# Altium PCB HT32.PcbDoc
Units mil, origin at the board's own origin, x right, y up, seen from the top; angles counter-clockwise.
Board outline 3940 x 2560 mil, 4 copper layers (Top Layer, GND02, POWER03, Bottom Layer), stack 23.756 mil thick; 44 components, 65 nets, 272 pads, 108 vias.
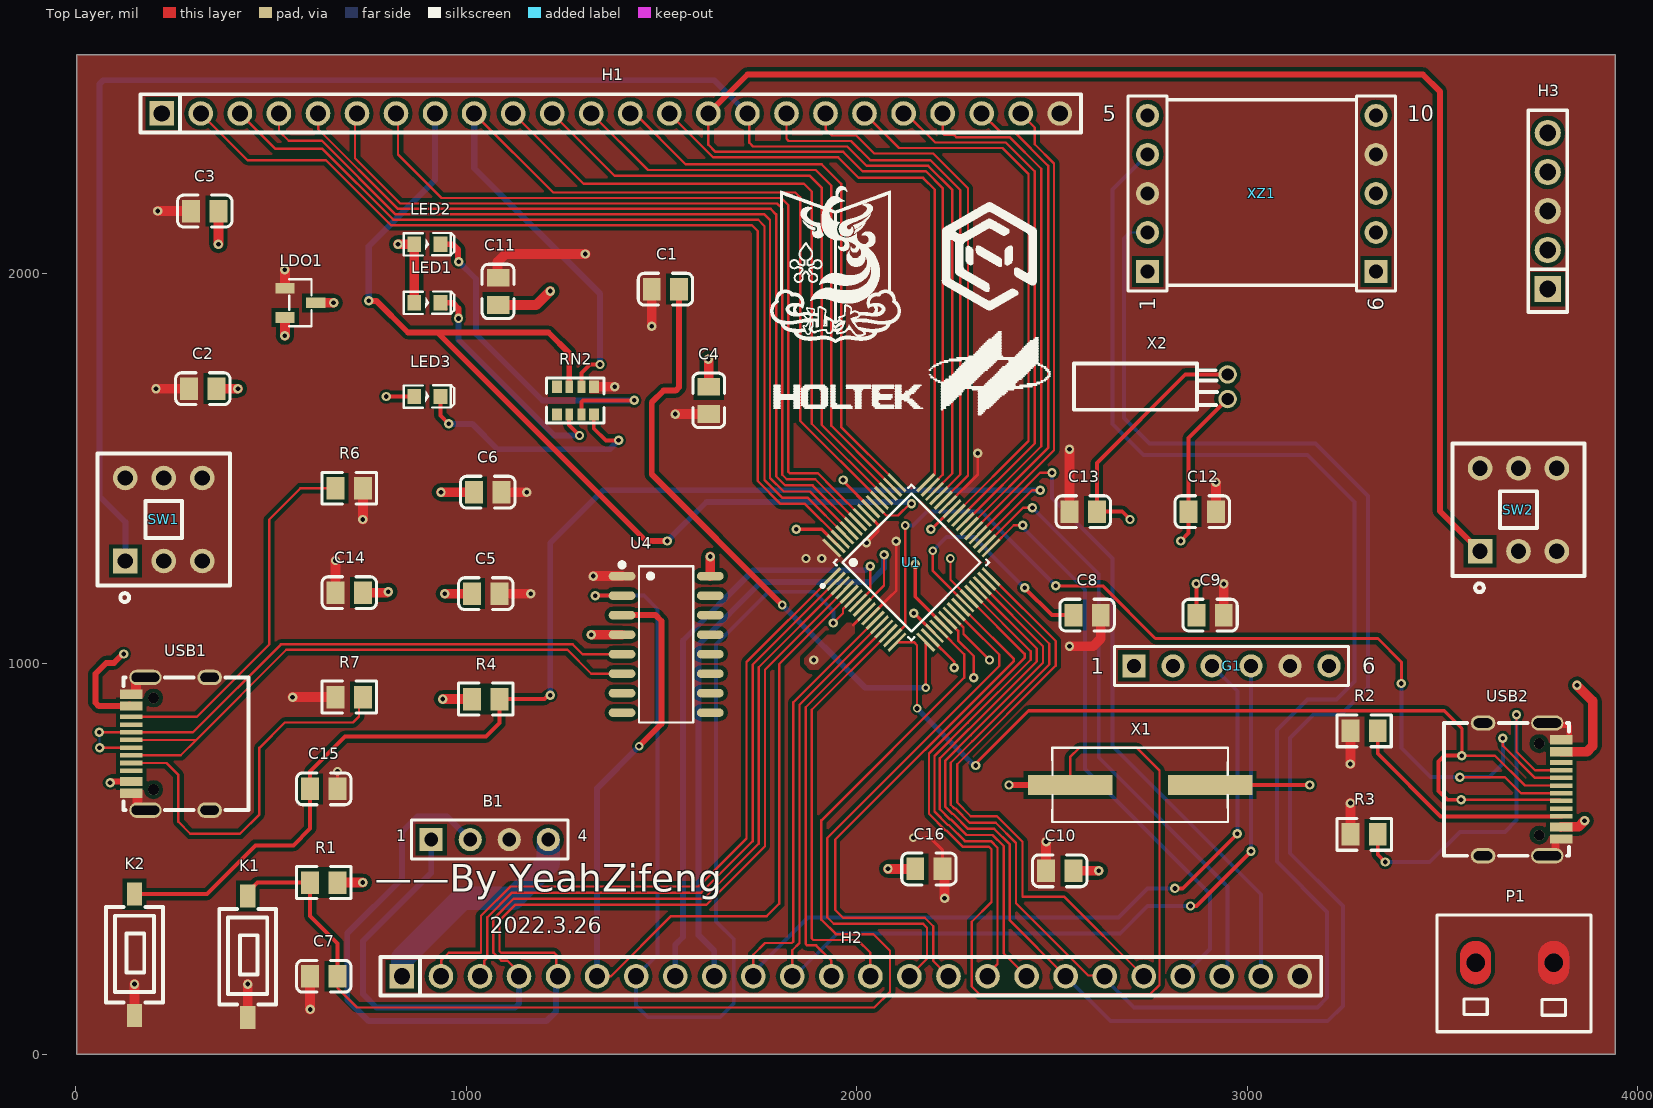
[diagram p0: Top Layer view]
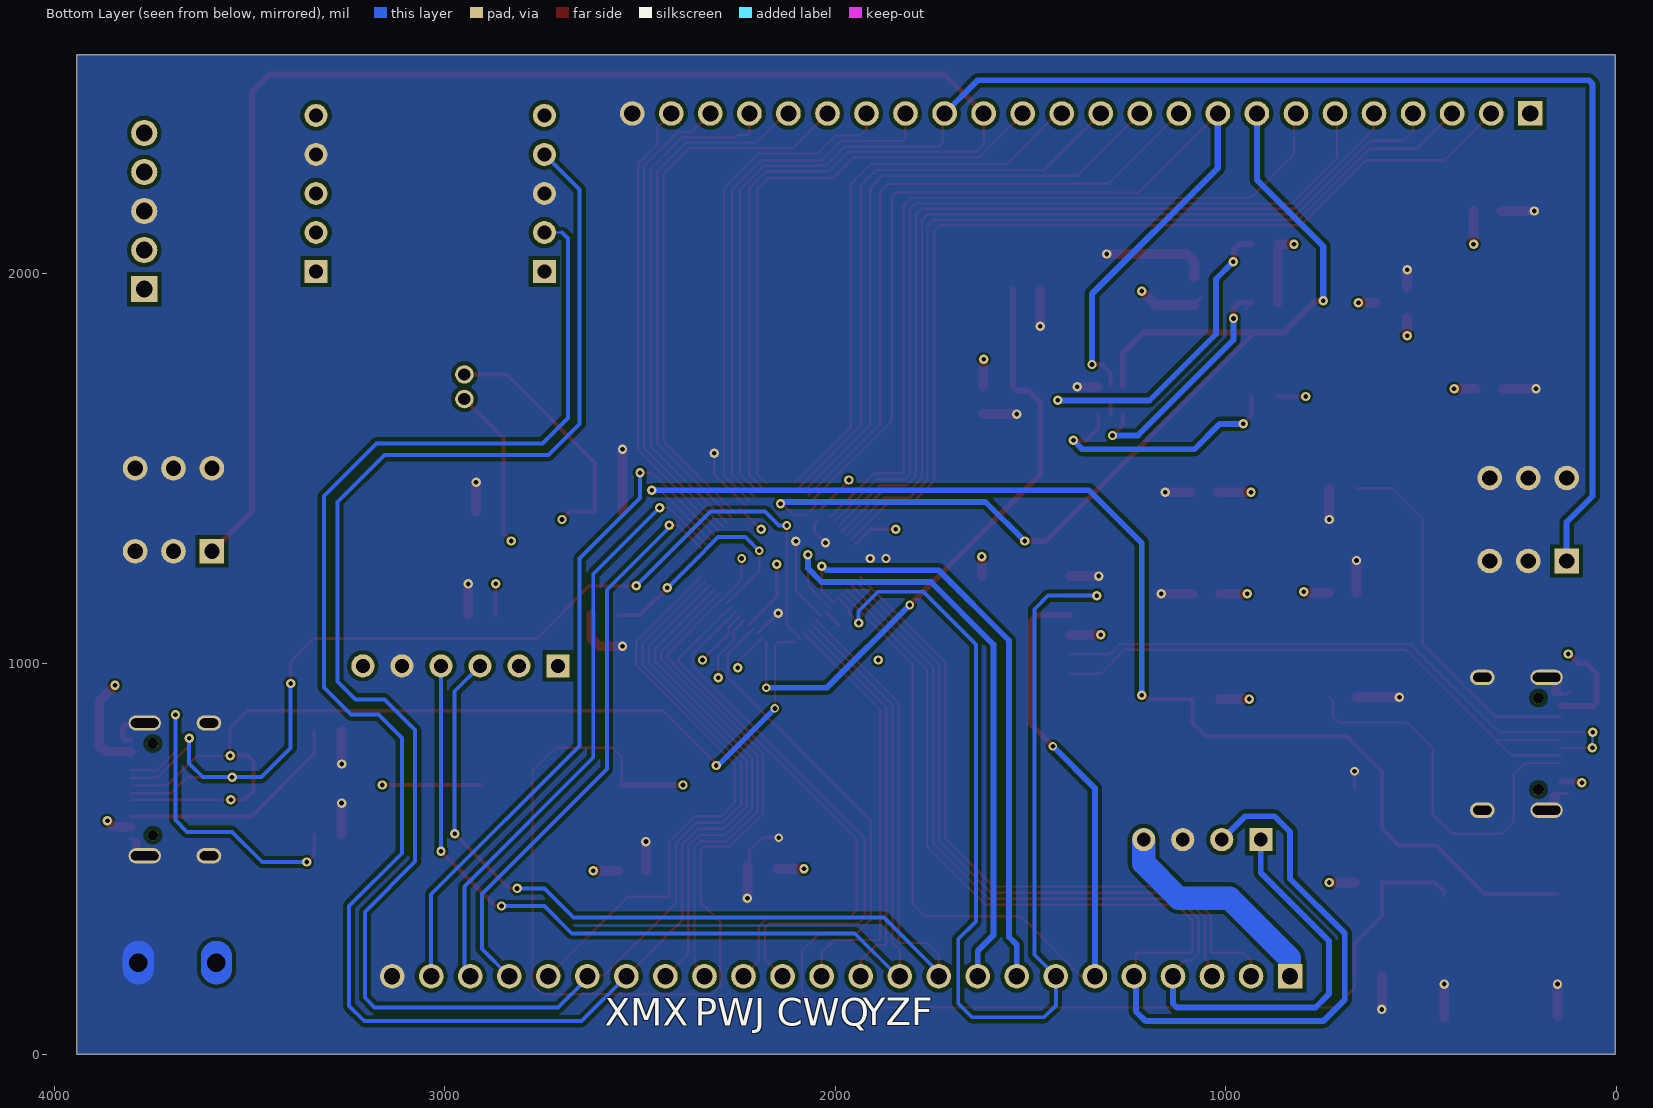
[diagram p1: Bottom Layer view, seen from below]
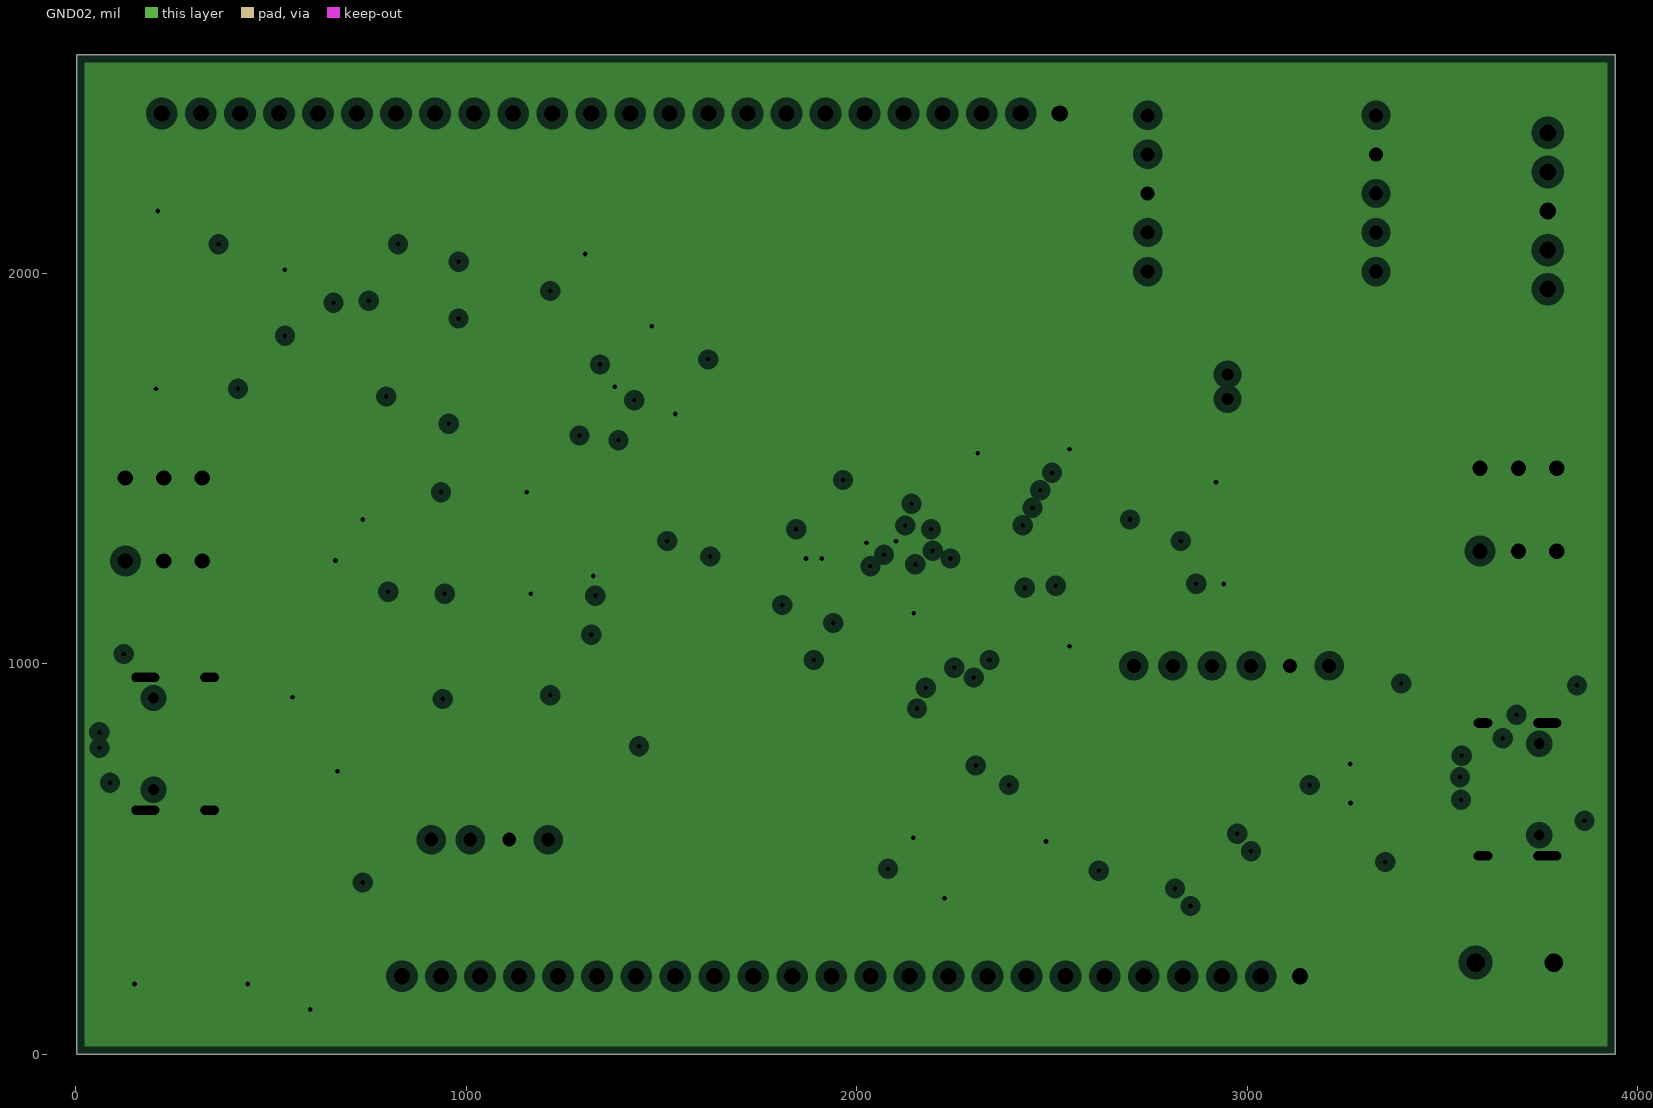
[diagram p2: GND02, clearances drawn from the general rule]
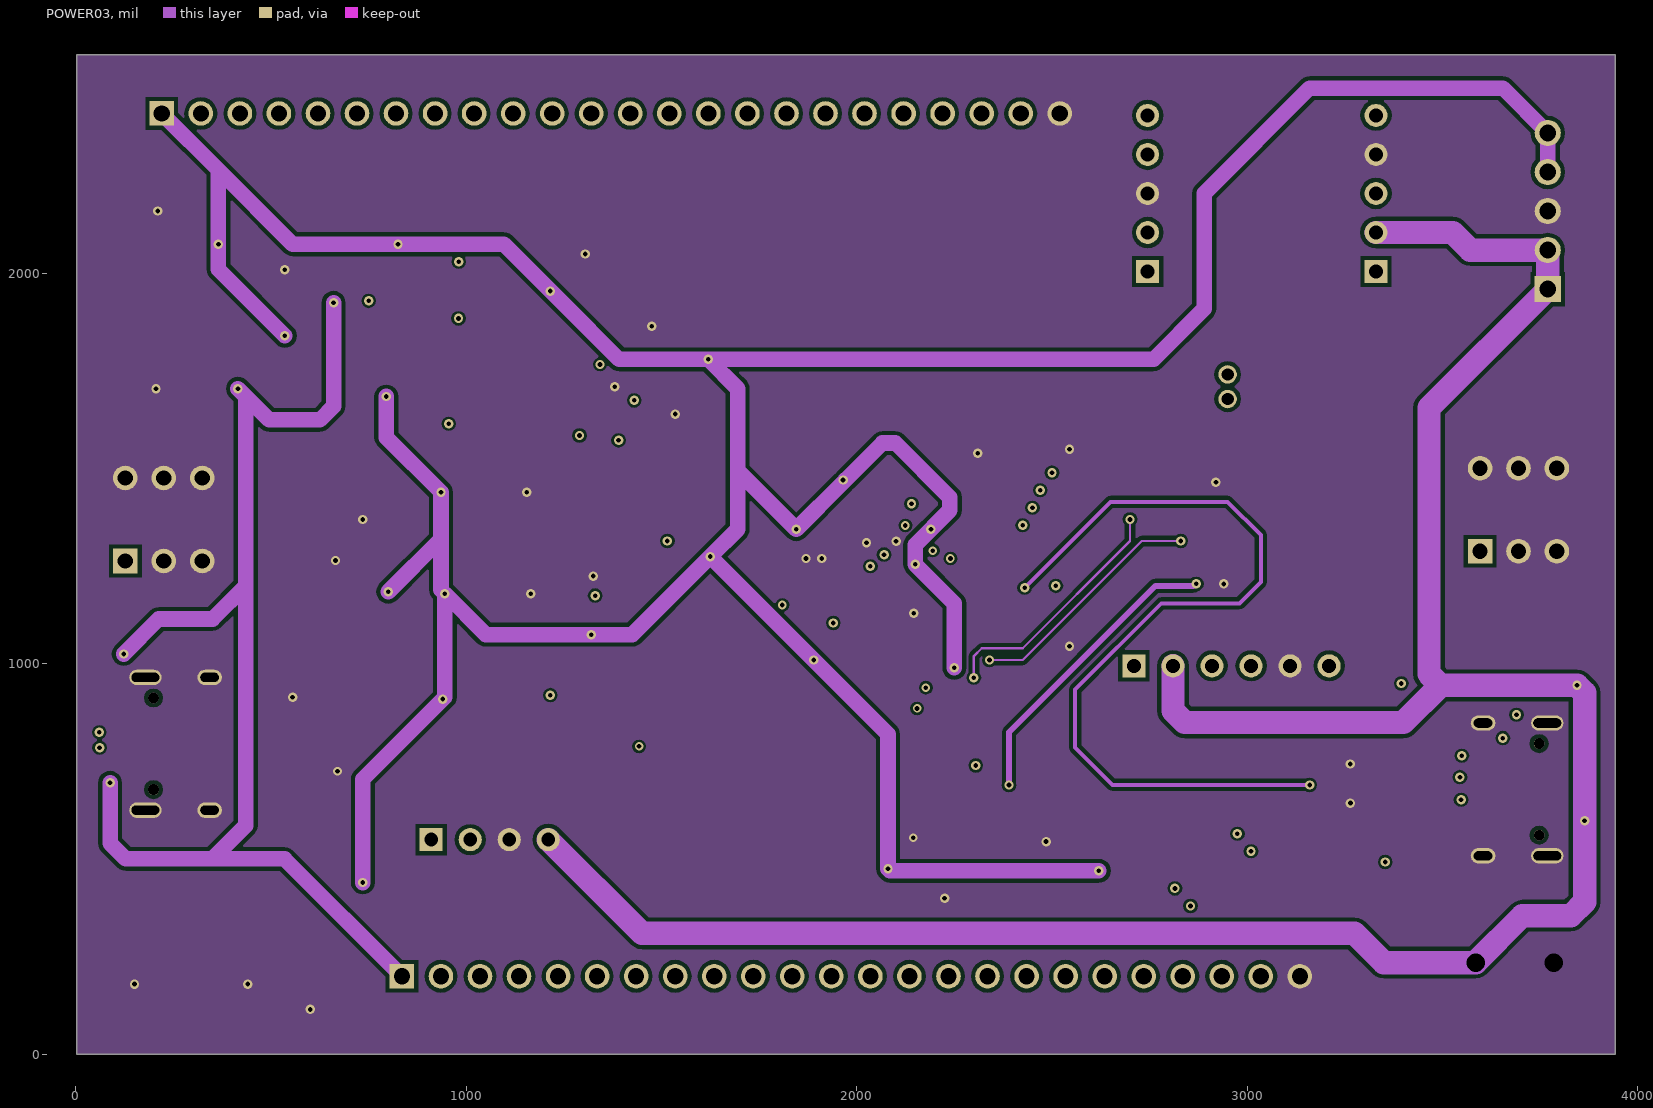
[diagram p3: POWER03]
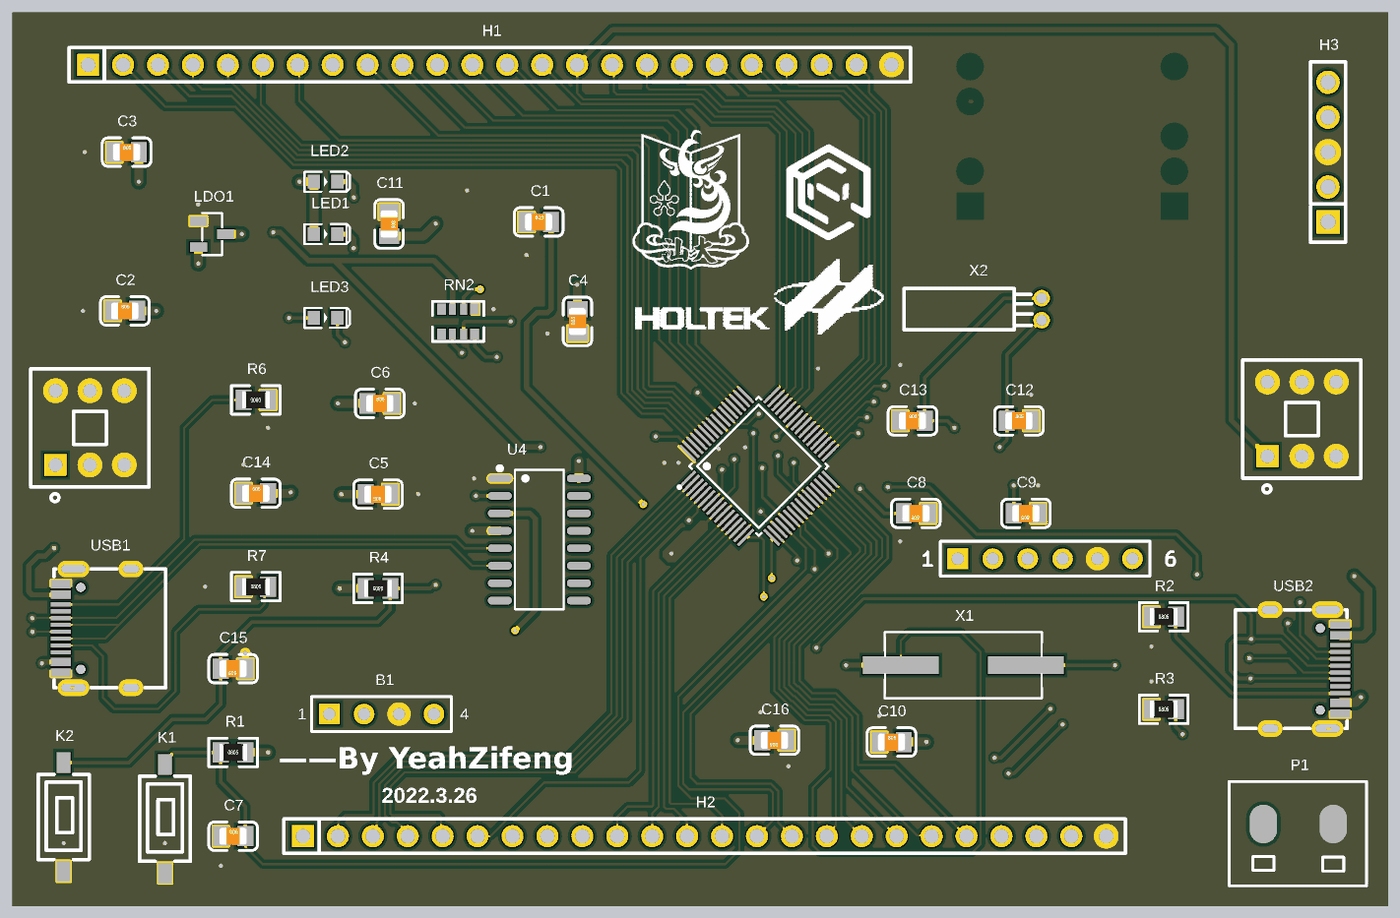
[diagram p4: 3D render of the assembled board from above, using the file's embedded part models]

## Layer stack, top to bottom
Top Solder: solder mask 0.4, Solder Resist, Dk 3.5
Top Layer: signal copper 1.4
Dielectric 2: prepreg 2.8, PP-006, Dk 4.1
GND02: plane copper 1.378, net GND
Dielectric 1: dielectric 12.6, FR-4, Dk 4.8
POWER03: signal copper 1.378
Dielectric 3: prepreg 2.8, PP-006, Dk 4.1
Bottom Layer: signal copper 1.4
Bottom Solder: solder mask 0.4, Solder Resist, Dk 3.5

## Board outline
2.5,0 2.5,2560 3942.5,2560 3942.5,0

## Design rules (kind name [scope] priority, off if disabled: settings)
Clearance [All] p1: gap=6 ignorepadtopadclearanceinfootprint=FALSE except(8: Arc-Arc Arc-Track Track-Track; 10: Arc-Fill Arc-Poly Arc-Region Track-Fill Track-Poly Track-Region SMDPad-Fill SMDPad-Poly SMDPad-Region THPad-Fill THPad-Poly THPad-Region Fill-Fill Fill-Poly Fill-Region Poly-Poly Poly-Region Region-Region)
PlaneClearance [InNetClass('PWR')] p1: clearance=20
PlaneConnect [All] p1: planeconnectstyle=Direct reliefexpansion=20 reliefentries=4 reliefconductorwidth=10 reliefairgap=10
PolygonConnect [All] p1: connectstyle=Direct reliefconductorwidth=10 reliefentries=4 polygonreliefangle="90 Angle" airgapwidth=10
RoutingVias [All] p1: holewidth=12 width=22 viastyle="Through Hole" minholewidth=12 minwidth=22 maxholewidth=12 maxwidth=24
SolderMaskExpansion [All] p1: expansion=4 istentingtop=FALSE
Width PWR [InNetClass('PWR')] p1: maxlimit=80 minlimit=7 preferedwidth=60 toplayer_maxwidth=30 toplayer_prefwidth=7 midlayer1_minwidth=25 bottomlayer_minwidth=25 bottomlayer_prefwidth=40 minimp=50.000000 maximp=50.000000 favimp=50.000000
Width [All] p2: maxlimit=25 minlimit=6 preferedwidth=15 toplayer_prefwidth=7 bottomlayer_prefwidth=10 minimp=50.000000 maximp=50.000000 favimp=50.000000
28 further rules are at their usual default settings.

## Classes and differential pairs
net class PWR: 3.3V +5V GND

## Components (designator, comment, footprint, x,y, rotation, side; value= is the part's Value field where it differs from the comment)
B1 "Bluetooth" HDR1X4 910,550 r0 top
C1 "2.2uF" 0805_C 1510,1960 r0 top
C2 "1u" 0805_C 325,1705 r0 top
C3 "1u" 0805_C 330,2160 r0 top
C4 "0.1u" 0805_C 1621.06,1675 r90 top
C5 "10uF" 0805_C 1050,1180 r180 top
C6 "100nF" 0805_C 1055,1440 r0 top
C7 "0.1uF" 0805_C 634.96,200 r0 top
C8 "22p" 0805_C 2590,1125 r180 top
C9 "22p" 0805_C 2905,1125 r180 top
C10 "0.1u" 0805_C 2520,470 r0 top
C11 "0.1u" 0805_C 1081.36,1954.13 r270 top
C12 "18p" 0805_C 2885,1390 r0 top
C13 "18p" 0805_C 2580,1390 r0 top
C14 "0.1u" 0805_C 700,1182.5 r0 top
C15 "0.1uF" 0805_C 634.96,680 r180 top
C16 "0.1u" 0805_C 2185,475 r180 top
G1 "GY61" HDR1X6 2710,995 r0 top
H1 "X6511WV-24H-C30D60" HDR-TH_24P-P2.54-V-M 1370,2410 r0 top
H2 "X6511WV-24H-C30D60" HDR-TH_24P-P2.54-V-M 1985,200 r0 top
H3 "210-91-05GB01" HDR-TH_5P-P2.54-V-M 3770,2160 r90 top
K1 "SW-PB" SW-SMD_L6.1-W3.7-LS7.9 440,250 r270 top
K2 "SW-PB" SW-SMD_L6.1-W3.7-LS7.9 150,255 r270 top
LDO1 "SC662K-3.3V" SOT-23-3_L2.9-W1.3-P1.90-LS2.4-BR 575,1925 r180 top
LED1 "LED-0603_B" LED0603_BLUE 900,1925 r0 top
LED2 "LED-0603_B" LED0603_BLUE 900,2075 r0 top
LED3 "LED-0603_B" LED0603_BLUE 900,1685 r0 top
P1 "电源" "PCBComponent_1 - duplicate" 3683.43,207.44 r0 top
R1 "4.7K" 0805_R 634.96,440 r0 top
R2 "5.1K" 0805_R 3299.46,828.6 r0 top
R3 "5.1K" 0805_R 3299.5,563.6 r0 top
R4 "4.7K" 0805_R 1050,910 r180 top
R6 "5.1K" 0805_R 700,1450 r180 top
R7 "5.1K" 0805_R 700,915 r0 top
RN2 "4.7K" RES-ARRAY-SMD_0603-8P-L3.2-W1.6-BL 1279.25,1674.57 r0 top
SW1 "PB21E09471" SW-TH_6P-L8.5-W8.5-P2.50-LS5.5-BL 225,1370 r0 top
SW2 "PB21E09471" SW-TH_6P-L8.5-W8.5-P2.50-LS5.5-BL 3695,1395 r0 top
U1 "HT32F52352" LQFP-64_L7.0-W7.0-P0.40-LS9.2-BL 2140,1260 r315 top
U4 "CH340C" SOP-16_L10.0-W3.9-P1.27-LS6.0-BL 1511.91,1050 r270 top
USB1 "TYPEC-304-BCP16" USB-C-SMD_TYPEC-304-BCP16 242.2,795.47 r90 top
USB2 "TYPEC-304-BCP16" USB-C-SMD_TYPEC-304-BCP16 3704.5,678.6 r270 top
X1 "8MHz" HC-49S_L11.4-W4.8 2725.75,690 r0 top
X2 "32.768K" OSC-TH_BD3.1-P0.8-D0.3 2950,1710 r0 top
XZ1 "旋转编码器" "rotary encoder" 7835,10715 r90 top

## Footprints (in the part's own frame and the unit in brackets; to place one, negate y for a bottom-side part, rotate by r counter-clockwise, add the part's x,y. Pads: shape width x height; smd on the part's side, far side on the other; paste and mask are expansions set on the pad)
0805_C [mm]
  rect 1.16x1.47 smd: 1(-0.89,0) 2(0.89,0)
  silkscreen extent -1.77,-1.04 1.77,1.04, body extent -1,-0.62 1,0.63, height 0.77
0805_R [mm]
  rect 1.16x1.47 smd: 1(-0.89,0) 2(0.89,0)
  silkscreen extent -1.77,-1.03 1.77,1.04, body extent -1,-0.62 1,0.63, height 0.49
HC-49S_L11.4-W4.8 [mm]
  rect 5.5x1.3 smd: 1(4.553,0) 2(-4.553,0)
  silkscreen extent -5.71,-2.41 5.71,2.41
HDR1X4 [mm]
  rect 1.5x1.5 hole 0.9: 1(0,0)
  round 1.5 hole 0.9: 2(2.54,0) 3(5.08,0) 4(7.62,0)
  silkscreen extent -1.27,-1.27 8.89,1.27
HDR1X6 [mm]
  rect 1.5x1.5 hole 0.9: 1(0,0)
  round 1.5 hole 0.9: 2(2.54,0) 3(5.08,0) 4(7.62,0) 5(10.16,0) 6(12.7,0)
  silkscreen extent -1.27,-1.27 13.97,1.27
HDR-TH_5P-P2.54-V-M [mm]
  rect 1.7x1.7 hole 1.1: 1(-5.08,0)
  round 1.7 hole 1.1: 2(-2.54,0) 3(0,0) 4(2.54,0) 5(5.08,0)
  silkscreen extent -6.56,-1.27 6.56,1.27
HDR-TH_24P-P2.54-V-M [mm]
  rect 1.6x1.6 hole 1.05: 1(-29.21,0)
  round 1.6 hole 1.05: 2(-26.67,0) 3(-24.13,0) 4(-21.59,0) 5(-19.05,0) 6(-16.51,0) 7(-13.97,0) 8(-11.43,0) 9(-8.89,0) 10(-6.35,0) 11(-3.81,0) 12(-1.27,0) 13(1.27,0) 14(3.81,0) 15(6.35,0) 16(8.89,0) 17(11.43,0) 18(13.97,0) 19(16.51,0) 20(19.05,0) 21(21.59,0) 22(24.13,0) 23(26.67,0) 24(29.21,0)
  silkscreen extent -30.6,-1.25 30.6,1.25
LED0603_BLUE [mm]
  rect 0.9x1 smd: 1(-0.85,0) 2(0.85,0)
  silkscreen extent -1.54,-0.73 1.75,0.73
LQFP-64_L7.0-W7.0-P0.40-LS9.2-BL [mm]
  rect 0.2x1.6 smd: 1(-3,-4.33) 2(-2.6,-4.33) 3(-2.2,-4.33) 4(-1.8,-4.33) 5(-1.4,-4.33) 6(-1,-4.33) 7(-0.6,-4.33) 8(-0.2,-4.33) 9(0.2,-4.33) 10(0.6,-4.33) 11(1,-4.33) 12(1.4,-4.33) 13(1.8,-4.33) 14(2.2,-4.33) 15(2.6,-4.33) 16(3,-4.33) 33(3,4.33) 34(2.6,4.33) 35(2.2,4.33) 36(1.8,4.33) 37(1.4,4.33) 38(1,4.33) 39(0.6,4.33) 40(0.2,4.33) 41(-0.2,4.33) 42(-0.6,4.33) 43(-1,4.33) 44(-1.4,4.33) 45(-1.8,4.33) 46(-2.2,4.33) 47(-2.6,4.33) 48(-3,4.33)
  rect 1.6x0.2 smd: 17(4.33,-3) 18(4.33,-2.6) 19(4.33,-2.2) 20(4.33,-1.8) 21(4.33,-1.4) 22(4.33,-1) 23(4.33,-0.6) 24(4.33,-0.2) 25(4.33,0.2) 26(4.33,0.6) 27(4.33,1) 28(4.33,1.4) 29(4.33,1.8) 30(4.33,2.2) 31(4.33,2.6) 32(4.33,3) 49(-4.33,3) 50(-4.33,2.6) 51(-4.33,2.2) 52(-4.33,1.8) 53(-4.33,1.4) 54(-4.33,1) 55(-4.33,0.6) 56(-4.33,0.2) 57(-4.33,-0.2) 58(-4.33,-0.6) 59(-4.33,-1) 60(-4.33,-1.4) 61(-4.33,-1.8) 62(-4.33,-2.2) 63(-4.33,-2.6) 64(-4.33,-3)
  silkscreen extent -3.58,-5.26 3.58,3.58
OSC-TH_BD3.1-P0.8-D0.3 [mm]
  round 1.2 hole 0.8: 1(0,0.8) 2(0,-0.8)
  silkscreen extent -10,-1.5 -0.7,1.5
"PCBComponent_1 - duplicate" [mm]
  round 0 hole 1.2: 1(-2.5,0.7) 2(2.58,0.7)
  Top Layer region: 251 vertices and 0 holes, not listed, extent -3.5,-0.7 -1.5,2.1
  Top Layer region: 251 vertices and 0 holes, not listed, extent 1.58,-0.7 3.58,2.1
  Bottom Layer region: 251 vertices and 0 holes, not listed, extent -3.5,-0.7 -1.5,2.1
  Bottom Layer region: 251 vertices and 0 holes, not listed, extent 1.58,-0.7 3.58,2.1
  silkscreen extent -5,-3.8 5,3.8
RES-ARRAY-SMD_0603-8P-L3.2-W1.6-BL [mm]
  rect 0.65x0.8 smd: 1(-1.2,-0.9) 4(1.2,-0.9) 5(1.2,0.9) 8(-1.2,0.9)
  rect 0.5x0.8 smd: 2(-0.4,-0.9) 3(0.4,-0.9) 6(0.4,0.9) 7(-0.4,0.9)
  silkscreen extent -1.87,-1.45 1.87,1.47
"rotary encoder" [mm]
  rect 1.5x1.5 hole 0.9: 1(-221.234,129.286) 6(-221.234,114.427)
  round 1.5 hole 0.9: 2(-218.694,129.286) 3(-216.154,129.286) 4(-213.614,129.286) 5(-211.074,129.286) 7(-218.694,114.427) 8(-216.154,114.427) 9(-213.614,114.427) 10(-211.074,114.427)
  silkscreen extent -222.5,113.16 -209.8,130.56
SOP-16_L10.0-W3.9-P1.27-LS6.0-BL [mm]
  oval 0.56x1.745 smd: 1(-4.445,-2.873) 2(-3.175,-2.873) 3(-1.905,-2.873) 4(-0.635,-2.873) 5(0.635,-2.873) 6(1.905,-2.873) 7(3.175,-2.873) 8(4.445,-2.873) 9(4.445,2.873) 10(3.175,2.873) 11(1.905,2.873) 12(0.635,2.873) 13(-0.635,2.873) 14(-1.905,2.873) 15(-3.175,2.873) 16(-4.445,2.873)
  silkscreen extent -5.33,-3.02 5.08,1.77
SOT-23-3_L2.9-W1.3-P1.90-LS2.4-BR [mm]
  rect 1.25x0.7 smd: 1(1,-0.95) 2(1,0.95) 3(-1,0)
  silkscreen extent -0.73,-1.53 0.73,1.53
SW-SMD_L6.1-W3.7-LS7.9 [mm]
  rect 1.5x1 smd: 1(-3.95,0) 2(3.95,0)
  silkscreen extent -3.1,-1.85 3.1,1.85
SW-TH_6P-L8.5-W8.5-P2.50-LS5.5-BL [mm]
  rect 1.6x1.6 hole 1: 1(-2.5,-2.7)
  round 1.6 hole 1: 2(0,-2.7) 3(2.5,-2.7) 4(-2.5,2.7) 5(0,2.7) 6(2.5,2.7)
  silkscreen extent -4.3,-5.36 4.3,4.3
USB-C-SMD_TYPEC-304-BCP16 [mm]
  oval 1x2.1 hole 0.6 slot 1.8 at 90 deg: 13(-4.32,1.633) 14(4.32,1.633)
  oval 1x1.6 hole 0.6 slot 1.2 at 90 deg: 15(-4.32,-2.547) 16(4.32,-2.547)
  rect 0.6x1.45 smd: A1B12(-3.225,2.547) A4B9(-2.45,2.547) B1A12(3.22,2.547) B4A9(2.45,2.547)
  rect 0.3x1.45 smd: A5(-1.25,2.547) A6(-0.25,2.547) A7(0.25,2.547) A8(1.25,2.547) B5(1.75,2.547) B6(0.75,2.547) B7(-0.75,2.547) B8(-1.75,2.547)
  round 0.7 hole 0.7 unplated: ""(-2.98,1.103) ""(2.98,1.103)
  silkscreen extent -4.32,-5.08 4.32,3.05

## Part data
H1 H2: BOM_JLCPCB Part Class="Extended Part", BOM_Manufacturer="XKB Connectivity", BOM_Manufacturer Part=X6511WV-24H-C30D60, BOM_Supplier=LCSC, BOM_Supplier Part=C725956, Contributor=LCSC, spicePre=H, spiceSymbolName=X6511WV-24H-C30D60
H3: BOM_JLCPCB Part Class="Extended Part", BOM_Manufacturer=PINREX, BOM_Manufacturer Part=210-91-05GB01, BOM_Supplier=LCSC, BOM_Supplier Part=C390682, Contributor=LCSC, spicePre=H, spiceSymbolName=210-91-05GB01
LDO1: BOM_JLCPCB Part Class="Extended Part", BOM_Manufacturer=FM, BOM_Manufacturer Part=SC662K-3.3V, BOM_Supplier=LCSC, BOM_Supplier Part=C83932, spicePre=L, spiceSymbolName=SC662K-3.3V
LED1 LED2 LED3: BOM_Manufacturer=EVERLIGHT(台湾亿光), BOM_Manufacturer Part=19-217/BHC-ZL1M2RY/3T, BOM_Supplier=LCSC, BOM_Supplier Part=C72041, Contributor=LCEDA_01, spicePre=L, spiceSymbolName=LED-0603_B
RN2: BOM_JLCPCB Part Class="Extended Part", BOM_Manufacturer=PANASONIC, BOM_Manufacturer Part=EXB-38V472JV, BOM_Supplier=LCSC, BOM_Supplier Part=C194232, Contributor=LCSC, nameAlias="Resistance (Ohms)", spicePre=R, spiceSymbolName=EXB-38V472JV
SW1 SW2: BOM_JLCPCB Part Class="Extended Part", BOM_Manufacturer=GANGYUAN, BOM_Manufacturer Part=PB21E09471, BOM_Supplier=LCSC, BOM_Supplier Part=C194403, Contributor=LCSC, spicePre=S, spiceSymbolName=PB21E09471
U1: BOM_JLCPCB Part Class="Extended Part", BOM_Manufacturer=HOLTEK, BOM_Manufacturer Part=HT32F52352, BOM_Supplier=LCSC, BOM_Supplier Part=C97188, spicePre=U, spiceSymbolName=HT32F52352
U4: BOM_JLCPCB Part Class="Extended Part", BOM_Manufacturer=WCH, BOM_Manufacturer Part=CH340C, BOM_Supplier=LCSC, BOM_Supplier Part=C84681, spicePre=U, spiceSymbolName=CH340C
USB1 USB2: BOM_JLCPCB Part Class="Extended Part", BOM_Manufacturer=XUNPU, BOM_Manufacturer Part=TYPEC-304-BCP16, BOM_Supplier=LCSC, BOM_Supplier Part=C720629, Contributor=LCSC, spicePre=U, spiceSymbolName=TYPEC-304-BCP16
X1: BOM_JLCPCB Part Class="Extended Part", BOM_Manufacturer="Zhejiang Abel Elec", BOM_Manufacturer Part=HC-49SM8MHz20pF30ppm, BOM_Supplier=LCSC, BOM_Supplier Part=C107426, Contributor=LCSC, nameAlias=Frequency, spicePre=X, spiceSymbolName=HC-49SM8MHZ20PF30PPM
X2: BOM_JLCPCB Part Class="Extended Part", BOM_Manufacturer="KDS Daishinku", BOM_Manufacturer Part=1TC125DFNS019, BOM_Supplier=LCSC, BOM_Supplier Part=C213421, Contributor=LCSC, nameAlias=Value, spicePre=X, spiceSymbolName=1TC125DFNS019
C1 C4 C10 C11 C14 C16: Contributor=LCEDA_Lib, nameAlias=Value(F), spicePre=C, spiceSymbolName=C_0603_EU
C2 C3 C8 C9 C12 C13: Contributor=LCEDA_Lib, nameAlias=Value(F), spicePre=C, spiceSymbolName=C_0603_US
C5 C6 C7 C15: nameAlias=Value(F), spicePre=C, spiceSymbolName=Cap_RAD-0.1_US
K1 K2: Contributor=ZhangYonghui, spicePre=K, spiceSymbolName=SW-PB
R1 R4: Contributor=LCEDA_Lib, nameAlias=Value(Ω), spicePre=R, spiceSymbolName=R_0603_US
R2 R3 R6 R7: BOM_Supplier=LCSC, nameAlias=Value(Ω), spicePre=R, spiceSymbolName=Resistor

## Via types
v1: diameter 24, hole 12, Top Layer to Bottom Layer, tented both sides, 98 vias
v2: diameter 22, hole 12, Top Layer to Bottom Layer, 6 vias
v3: diameter 22, hole 12, Top Layer to Bottom Layer, tented both sides, 4 vias

## Nets (pads, with @x,y where several pads share a name; then routed paths per layer and width w, separated by ;. In a path a pad name is that pad's centre, name@x,y a point inside that pad or via, vN(x,y) a via of type N, cw(c..) or ccw(c..) an arc to the next point about the centre after c; other vN are vias at no path point)
3.3V: C3.2 C4.2 C5.2 C6.1 C10.2 C11.2 C14.2 C16.2 H1.1 H3.4 H3.5 LDO1.2 LED1.1 LED2.1 LED3.1 R1.2 R4.2 U1.9 U1.18 U1.21 U1.42 U1.55 U1.63 U4.4 U4.16 | length 12568.4
  Top Layer w7: 1991.14,1100 U1.9 ; U1.55 U1.55@2036.16,1397.86 ; U1.18 2250,1005.24 v1(2250,990)
  Top Layer w8: v1(1845,1345) 1910.24,1345 U1.63 ; v1(1965,1471) 1965,1469.03 U1.55@2036.16,1397.86 ; v1@2150,1260 v1(2150,1255) 2150,1172.05 U1.21 ; v1(2190,1345) 2191.59,1345 U1.42
  Top Layer w10: v1(795,1685) LED3.1 ; C11.2@1063.53,1936.93 C11.2
  Top Layer w25: v1(365.04,2075.04) C3.2 ; v1(535.32,1840.32) 535.63,1840.63 LDO1.2 ; R1.2 v1(735,440) ; C14.2 797.5,1182.5 v1(800,1185) ; v1(825,2075) LED2.1 LED1.1 ; v1(935,1440) C6.1 ; v1(940,910) R4.2 ; v1(945,1180) C5.2 ; C11.2 1179.09,1919.09 v1(1215,1955) ; v1(1320,1075) U4.4 ; v1(1620,1780) 1621.06,1778.94 C4.2 ; U4.16 v1(1625,1275) ; v1(2080,475) C16.2 ; C10.2 v1(2620,470)
  POWER03 w25: 935,1190 v1(945,1180) ; v1(940,910) v1@945,915 ; v1@1965,1465 v1(1965,1471) ; v1(2080,475) v1@2085,470
  POWER03 w40: H1.1 365.04,2264.96 ; v1(535.32,1840.32) 365.04,2010.59 v1(365.04,2075.04) 365.04,2264.96 ; v1(735,440) 735,705 v1(940,910) ; v1(795,1685) 795,1580 v1(935,1440) 935,1320 ; v1(800,1185) 935,1320 ; v1(825,2075) 555,2075 365.04,2264.96 ; v1(825,2075) 1096.32,2075.04 1245.68,1925.68 1391.36,1780 v1(1620,1780) ; 935,1190 935,1320 ; v1@945,915 v1(945,1180) 1050,1075 v1(1320,1075) 1425,1075 v1(1625,1275) ; v1@1965,1465 v1(1845,1345) 1695,1495 ; v1@1971,1471 2065.93,1565.93 2099.07,1565.93 2238.43,1426.57 2238.43,1393.43 2150,1305 v1(2150,1255) 2250,1155 v1(2250,990) ; v1(2080,475) 2080,820 v1(1890,1010) v1(1625,1275) ; v1@2085,470 v1(2620,470) ; H3.4 H3.5 3655,2475 3160,2475 2890,2205 2890,1910 2760,1780 v1(1620,1780) ; v1(1620,1780) 1695,1705 1695,1495 ; v1(1625,1275) 1695,1345 1695,1495
+5V: B1.4 C2.2 G1.2 H2.1 H3.1 H3.2 LDO1.3 P1.1 USB1.A4B9 USB1.B4A9 USB2.A4B9 USB2.B4A9 XZ1.7 | length 10862.8
  Top Layer w15: v1(87.5,695.55) 90.96,699.01 USB1.A4B9 ; v1(122.5,1025.55) 120.06,1025.55 97.13,1002.62 77.62,1002.62 50,975 50,900.71 58.79,891.93 USB1.B4A9 USB1.B4A9@137.6,896.24
  Top Layer w25: C2.2 v1(415,1705) ; LDO1.3 v1(660,1925) ; USB2.B4A9 3805.48,582.84 3848.73,582.84 v1(3864.28,598.39) ; USB2.A4B9 3870.36,775.06 3885,789.71 3885,905 v1(3845,945)
  POWER03 w40: v1(87.5,695.55) 87.5,540.55 127.5,500.55 349.45,500.55 ; v1(122.5,1025.55) 211.95,1115 350,1115 435,1200 ; v1(415,1705) 435,1685 ; v1(660,1925) 660,1660 625,1625 495,1625 435,1685 ; H2.1 534.45,500.55 349.45,500.55 ; 349.45,500.55 435,586.1 435,1200 ; 435,1200 435,1685
  POWER03 w60: B1.4 1450,310 3275,310 3349.99,235.01 P1.1 3705,355 3829.13,355 3864.28,390.15 v1(3864.28,598.39) 3864.28,925.72 v1(3845,945) 3495,945 ; G1.2 2810,880 2840,850 3400,850 3495,945 ; XZ1.7 3526.56,2105 3571.56,2060 H3.2 H3.1 3465.84,1655.84 3465.84,974.16 3495,945
  Bottom Layer w60: H2.1 836.5,201.5 836.5,246.5 990,400 1120,400 1210,490 B1.4
CDP+: U1.16 USB2.A6 USB2.B6 | length 2575.6
  Top Layer w6: U1.16 2146.5,1055.94 2154.5,1047.94 v2(2154.5,886) ; v1(3547.96,652.04) 3801.83,652.04 USB2.B6 ; v1(3550,765) 3635,765 3711.55,688.45 USB2.A6
  Top Layer w8: v1(2305,740) 2305,745 2440,880 3505,880 3550,835 v1(3550,765)
  Top Layer w10: v1(3547.96,652.04) 3512.96,652.04 3490,675 3490,750 3505,765 v1(3550,765)
  Bottom Layer w8: v1@2300.5,740 v1(2305,740)
  Bottom Layer w15: v2(2154.5,886) v1@2300.5,740
CDP-: U1.15 USB2.A7 USB2.B7 | length 2816.7
  Top Layer w6: U1.15 2124.63,1099.87 v3(2124.63,1354.63) ; v1(3545,710) 3660,710 3701.24,668.76 USB2.A7 ; v1(3655,810) 3655,790.2 3737.07,708.13 USB2.B7
  Top Layer w8: v1(2510,1200) 2630,1200 2765,1065 3335,1065 3395,1005 v1(3395,950)
  Bottom Layer w10: v3(2124.63,1354.63) 2144.63,1354.63 2180,1390 2320,1390 v1(2510,1200) ; v1(3395,950) 3395,785 3470,710 v1(3545,710) 3620,710 3655,745 v1(3655,810)
CLDO: C1.2 U1.17 | length 1567.1
  Top Layer w6: v2(2177.03,939) U1.17
  Top Layer w15: C1.2 C1.2 1545,1708.79 1536.21,1700 1505,1700 1475,1670 1475,1485.5 v2(1809.5,1151)
  Bottom Layer w15: v2(1809.5,1151) 2021.5,939 v2(2177.03,939)
DP+: U4.5 USB1.A6 USB1.B6 | length 1563.4
  Top Layer w6: v1(60,825) USB1.B6 300,825 525.08,1050.08 1272.76,1050.08 1297.84,1025 U4.5 ; v1(60.63,785.63) USB1.A6
  Bottom Layer w6: v1(60,825) 60.31,824.69 60.31,785.94 v1(60.63,785.63)
DP-: U4.6 USB1.A7 USB1.B7 | length 1560.3
  Top Layer w6: USB1.B7 268.78,765.94 308.15,805.31 ; USB1.A7 308.15,805.31 ; U4.6 1320,975 1258.92,1036.08 538.92,1036.08 308.15,805.31
GND: B1.3 C1.1 C2.1 C3.1 C4.1 C5.1 C6.2 C7.1 C8.1 C9.1 C10.1 C11.1 C12.2 C13.1 C14.1 C15.1 C16.1 G1.5 H1.24 H2.24 H3.3 K1.2 K2.2 LDO1.1 P1.2 R2.1 R3.1 R6.1 R7.1 RN2.5 SW1.2 SW1.3 SW1.4 SW1.5 SW1.6 SW2.2 SW2.3 SW2.4 SW2.5 SW2.6 U1.10 U1.19 U1.43 U1.56 U1.64 U4.1 USB1.13 USB1.14 USB1.15 USB1.16 USB1.A1B12 USB1.B1A12 USB2.13 USB2.14 USB2.15 USB2.16 USB2.A1B12 USB2.B1A12 XZ1.3 XZ1.9 | length 3589.4
  Top Layer w7: 2089.2,1175.8 2101.5,1188.09 2101.5,1313.5 v1(2100.75,1314.25) ; U1.43 2310,1485.68 v1(2310,1540)
  Top Layer w8: USB1.B1A12@117.37,930.05 125.18,922.24 USB1.B1A12 145.93,922.24 USB1.B1A12@153.75,930.05 ; USB1.A1B12@125.18,668.5 USB1.A1B12 149.69,668.5 USB1.A1B12@157.5,660.69 ; K2.2@150,96.5 K2.2 ; USB1.14@153.75,951.06 168.24,965.55 USB1.14 ; USB1.13@157.5,639.89 171.99,625.39 USB1.13 ; K1.2 K1.2@440,96.5 ; v1@533.75,2011.25 v1@535.63,2009.37 ; C14.1 C14.1@664.96,1194 ; C15.1 v2(670,724.94) ; v1@735.04,1378 R6.1 ; U4.1@1382.5,1225 U4.1 ; 1590.46,1639.96 C4.1 ; v1(2025,1310) 2054.08,1339.08 2054.08,1357.05 U1.56@2044.47,1366.67 ; U1.10 2089.2,1175.8 ; v3(2145,555) 2187.5,555 2220.04,522.46 C16.1 ; v1(2145.63,1130) 2147.51,1130 2157.83,1119.68 U1.19 ; C10.1 2484.96,502.46 ; C12.2 2920.04,1426 ; C9.1 2940.04,1177.46 ; v1@3259.5,738.6 v1@3262.56,735.54 ; v1(3264.5,643.6) v1(3264.5,643.6) ; USB2.14 3775.51,508.53 USB2.14@3790,523.02 ; USB2.B1A12@3790,544.02 3797.81,551.83 USB2.B1A12
  Top Layer w15: v1(2545,1550) v1(2545,1550) ; USB2.13 3773.44,844.02 3820.88,844.02 3825,839.9 3825,809.89 3820.69,805.58 USB2.A1B12
  Top Layer w20: USB2.14@3790,523.02 USB2.B1A12@3790,544.02
  Top Layer w25: K2.2 v1(150,180) ; USB1.B1A12@153.75,930.05 USB1.14@153.75,951.06 ; USB1.13@157.5,639.89 USB1.A1B12@157.5,660.69 ; v1(205,1705) C2.1 ; v1(210,2160) C3.1 ; K1.2 v1(440,180) ; v1(535,2010) 535.63,2009.37 LDO1.1 ; v1(555,915) R7.1 ; C7.1 v1(599.92,115.08) v1@600,115 ; C14.1 v1(665,1265) v1(665,1265) ; v1(735,1370) v1(735,1370) R6.1 ; C11.1 1080,1990.53 1080,2030 1100,2050 v1(1305,2050) ; C5.1 v1(1165,1180) ; C6.2 v1(1155,1440) ; v1(1325,1225) U4.1 ; RN2.5 v1(1380,1710) ; C1.1 v1(1474.96,1865.04) v1(1474.96,1865.04) ; v1(1534.96,1639.96) C4.1 ; C16.1 C16.1@2225,470.04 ; v1(2225,400) C16.1@2225,470.04 ; C16.1@2225,480 C16.1@2225,470.04 ; C10.1 v1(2484.96,544.96) v1(2484.96,544.96) ; C13.1 v1(2545,1550) ; v1(2545,1045) 2605,1045 2625.04,1065.04 C8.1 ; v1(2920.04,1464.96) v1(2920.04,1464.96) C12.2 ; v1(2940.04,1204.96) v1(2940.04,1204.96) C9.1 ; v1(3264.42,743.53) R2.1 ; R3.1 v1(3264.5,643.6) v1(3264.5,643.6)
  other v1: 1870,1270 1910,1270
NetLED1_2: LED1.2 RN2.2 | length 642
  Top Layer w6: LED1.2 933.46,1923.03 LED1.2@948.18,1908.32 ; v1@976.56,1888.44 v1(980,1885)
  Top Layer w10: RN2.2 1263.5,1611.5 v1(1290,1585)
  Top Layer w15: LED1.2 965,1925 980,1910 v1(980,1885)
  Bottom Layer w6: 979.99,1825.01 979.99,1829.99
  Bottom Layer w15: v1(980,1885) 980,1830 1225,1585 v1(1290,1585)
NetLED2_2: LED2.2 RN2.3 | length 932.6
  Top Layer w6: LED2.2@933.46,2073.03 LED2.2
  Top Layer w10: RN2.3 1295,1671.49 1298.51,1675 v1(1430,1675)
  Top Layer w15: LED2.2 965,2075 979.02,2060.98 979.02,2031.72 v1(980.75,2030)
  Bottom Layer w15: v1(980.75,2030) 1025,1985.75 1025,1845 1195,1675 v1(1430,1675)
NetLED3_2: LED3.2 RN2.4 | length 662.1
  Top Layer w10: LED3.2 933.46,1636.54 v1(955,1615) ; RN2.4 1326.49,1603.51 1357.33,1572.67 v1(1390,1572.67)
  Bottom Layer w15: v1(955,1615) 1015,1615 1080,1550 1367.33,1550 v1(1390,1572.67)
NetR2_2: R2.2 USB2.B5 | length 595
  Top Layer w10: R2.2 3334.5,770.5 3495.29,609.71 USB2.B5
NetR3_2: R3.2 USB2.A5 | length 959.1
  Top Layer w6: v1(3690,870) 3690,775 3737.18,727.82 USB2.A5
  Top Layer w10: R3.2 3334.54,511.6 v1(3353.54,492.6)
  Bottom Layer w10: v1(3353.54,492.6) 3467.6,492.6 3545,570 3660,570 3690,600 v1(3690,870)
NetR6_2: R6.2 USB1.B5 | length 953.1
  Top Layer w6: USB1.B5 309.37,864.37 495,1050 495,1370 575,1450 R6.2
NetR7_2: R7.2 USB1.A5 | length 1006.7
  Top Layer w6: USB1.A5 231.79,746.26 262.5,715.55 262.5,595.55 293.05,565 420.42,565 470,614.58 470,785 535,850 710,850 725,865 725,904.96 R7.2
NRST: C7.2 K1.1 R1.1 U1.20 | length 3167.7
  Top Layer w6: K1.1 K1.1@440,415.35 ; C7.2 670,170 720,120 2045,120 2085,160 2085,265.5 2042.5,308 1946.5,308 1909.5,345 1909.5,599.3 2275,964.8 2275,1024.78 U1.20
  Top Layer w10: K1.1@440,415.35 464.65,440 R1.1 599.92,354.08 670,284 C7.2
PA0: H2.2 U1.1 | length 1768.5
  Top Layer w6: H2.2 935.5,200.5 935.5,240.5 955,260 1037.76,260 1037.76,354.91 1112.85,430 1595,430 1717.76,552.76 1717.76,1004.79 U1.1
PA1: H2.3 U1.2 | length 1673.5
  Top Layer w6: H2.3 1045.9,210.9 1045.9,239.36 1053.5,246.96 1053.5,350.86 1116.9,414.25 1601.52,414.25 1733.5,546.23 1733.5,998.27 U1.2
PA2: B1.1 H2.4 U1.3 | length 2646.8
  Top Layer w6: H2.4 1135,210 1105,240 1089.25,240 1069.25,260 1069.25,346.81 1120.95,398.5 1608.05,398.5 1749.25,539.71 1749.25,991.74 U1.3
  Bottom Layer w15: B1.1 910,465 735,290 735,155 770,120 1125,120 1135,130 H2.4
PA3: B1.2 H2.5 U1.4 | length 3149
  Top Layer w6: H2.5 1230,205 1230,255 1225,260 1089.05,260 1085,264.05 1085,342.76 1125,382.76 1614.57,382.76 1765,533.19 1765,985.22 U1.4
  Bottom Layer w6: H2.5@1230,195 H2.5
  Bottom Layer w15: B1.2 950,610 875,610 835,570 835,450 695,310 695,140 750,85 1205,85 1230,110 H2.5@1230,195
PA4: H2.6 U1.5 U4.3 | length 2495.9
  Top Layer w6: H2.6 1370.5,200 1524.5,354 1769.5,354 1801.5,386 1801.5,999.45 1947.05,1145 U1.5
  Top Layer w15: U4.3 1485,1125 1500,1110 1500,846.5 v2(1442.5,789)
  Bottom Layer w15: H2.6 1335,681.5 v2(1442.5,789)
PA5: H2.7 U1.6 U4.2 | length 2987
  Top Layer w6: v1(1940,1105) 1965,1130 1965,1140.68 U1.6
  Top Layer w10: v1(1330,1175) U4.2
  Bottom Layer w10: v1(1330,1175) 1455,1175 1490,1140 1490,255 H2.7 1435,125 1465,95 1650,95 1685,130 1685,295 1640,340 1640,1050 1775,1185 1890,1185 1940,1135 v1(1940,1105)
PA6: H2.8 U1.7 | length 1535.7
  Top Layer w6: U1.7@2002.76,1157.65 U1.7 2035,1188.41 v1(2035,1250)
  Bottom Layer w15: H2.8 1535,280.69 1555,300.69 1555,1060 1735,1240 2022.56,1240 2032.56,1250 v1(2035,1250)
PA7: H2.9 U1.8 | length 1615.6
  Top Layer w6: U1.8 2070,1201.14 v1(2070,1280)
  Bottom Layer w15: H2.9 1635,265 1595,305 1595,1050 1755,1210 2035,1210 2070,1245 v1(2070,1280)
PA8: H2.22 U1.34 | length 1568.4
  Top Layer w6: U1.34 2334.25,1308.16 2426.09,1400 v1(2450,1400)
  Bottom Layer w10: v1(2450,1400) 2620,1230 2620,760 2950,430 2950,229.34 2935,214.34 H2.22
PA9_BOOT: C15.2 K2.1 R4.1 U1.35 | length 3299.3
  Top Layer w6: v1@1210.13,920 v1(1215,920) ; U1.35 2323.11,1319.3 2448.81,1445 v1(2470,1445)
  Top Layer w10: K2.1 336.02,410.51 460.51,535 556.92,535 599.92,578 C15.2 599.92,724.92 689,814 1050.5,814 1085.04,848.54 R4.1 1200.13,910 v1@1210.13,920
  Bottom Layer w15: v1(1215,920) 1215,1310 1350,1445 v1(2470,1445)
PA10: H2.23 U1.36 | length 1767
  Top Layer w6: U1.36 2470.22,1490 v1(2500,1490)
  Bottom Layer w10: v1(2500,1490) 2500,1425 2655,1270 2655,790 3035,410 H2.23
PA11: H1.23 U1.37 | length 1188.8
  Top Layer w6: U1.37 2505.07,1547.12 2505.07,2281.95 2456.01,2331.01 2456.01,2373.99 H1.23
PA12_SWCLK: H1.22 U1.38 | length 1233.3
  Top Layer w6: U1.38 2289.71,1352.7 2490.26,1553.25 2490.26,2275.82 2402.66,2363.41 2366.59,2363.41 H1.22
PA13_SWDIO: H1.21 U1.39 | length 1326.6
  Top Layer w6: H1.21 2220,2360 2225,2355 2249.41,2355 2255,2349.41 2391.46,2349.41 2472.43,2268.43 2472.43,1557.7 2278.57,1363.84 U1.39
PA14: H1.20 U1.40 | length 1362.3
  Top Layer w6: H1.20 2126.54,2410 2201.14,2335.41 2381.86,2335.41 2455.75,2261.52 2455.75,1564.61 U1.40
PA15: H1.19 U1.41 | length 1429.7
  Top Layer w6: H1.19 2108.59,2321.41 2373.59,2321.41 2440,2255 2440,1571.14 U1.41
PB0: H1.18 U1.44 | length 1292.9
  Top Layer w6: H1.18 1920.5,2409.5 1920.5,2369.5 1936.5,2353.5 1998.91,2353.5 2045,2307.41 2195.85,2307.41 2285,2218.26 2285,1482.95 U1.44
PB1: H1.17 U1.45 | length 1370
  Top Layer w6: H1.17 1820,2345 1825.5,2339.5 1985.5,2339.5 2035,2290 2188.64,2290 2265,2213.64 2265,1485.22 U1.45
PB2: H1.13 U1.49 | length 1439.7
  Top Layer w6: H1.13 1431.76,2410 1561.76,2280 1910,2280 1960,2230 1960,1607.03 U1.49
PB3: H1.12 U1.50 | length 1528.7
  Top Layer w6: H1.12 1465,2265 1895,2265 1935,2225 1935,1610 2062.02,1482.98 2091.84,1453.16 U1.50
PB4: H1.11 U1.51 | length 1617.6
  Top Layer w6: H1.11 1380,2250 1880,2250 1910,2220 1910,1612.49 2048.02,1474.47 U1.51
PB5: H1.10 U1.52 | length 1703.6
  Top Layer w6: H1.10 1300,2230 1865,2230 1885,2210 1885,1615.22 U1.52
PB6: H1.4 U1.60 | length 2316.4
  Top Layer w6: H1.4 520,2365 545,2340 630.4,2340 818.92,2151.48 1763.52,2151.48 1777.76,2137.25 1777.76,1476.59 1812.85,1441.5 1880.56,1441.5 U1.60
PB7: H1.3 U1.61 | length 2377.7
  Top Layer w6: H1.3 510,2320 630.6,2320 813.12,2137.48 1747.52,2137.48 1763.76,2121.25 1763.76,1470.79 1808.64,1425.9 1874.1,1425.9 1969.35,1330.65 U1.61
PB8: H1.2 U1.62 | length 2465.1
  Top Layer w6: H1.2 439.8,2290.2 640.6,2290.2 807.32,2123.48 1731.52,2123.48 1746.26,2108.74 1746.26,1468.48 1804.74,1410 1867.51,1410 U1.62
PB15: H2.16 U1.28 | length 1259.6
  Top Layer w6: U1.28 2445.75,1032.2 2445.75,1010.95 2284.05,849.25 2283.85,849.25 2199,764.4 2199,621.8 2233.3,587.5 2235.53,587.5 2276.96,546.07 2344.05,546.07 2360.75,529.38 2360.75,231.52 2335,205.78 H2.16
PC0: H2.17 U1.29 | length 1287.7
  Top Layer w6: U1.29 2461.5,1038.72 2461.5,1006.9 2288.1,833.5 2287.9,833.5 2213,758.6 2213,627.6 2239.1,601.5 2241.33,601.5 2281.01,561.82 2348.1,561.82 2376.5,533.43 2376.5,258.5 H2.17
PC1: H1.7 U1.57 | length 2081.1
  Top Layer w6: H1.7 825,2405 825,2305 936.52,2193.48 1806.52,2193.48 1825,2175 1825,1492.25 1828.51,1488.74 1900.13,1488.74 1941.93,1446.93 U1.57
PC2: H1.6 U1.58 | length 2189.5
  Top Layer w6: H1.6 715,2405 715,2295 830.52,2179.48 1795.52,2179.48 1809.25,2165.75 1809.25,1484.69 1820.95,1472.99 1893.6,1472.99 U1.58
PC3: H1.5 U1.59 | length 2225.9
  Top Layer w6: H1.5 620.7,2409.3 620.7,2369.5 824.72,2165.48 1779.52,2165.48 1793.5,2151.5 1793.5,1480.64 1816.9,1457.24 1887.08,1457.24 U1.59
PC4: G1.3 H2.10 U1.11 | length 2935.2
  Top Layer w6: H2.10 1735,255 1765,285 1833.71,285 1837.76,289.05 1837.76,902.08 U1.11
  Top Layer w10: v1(2815,425) 2835,425 v1(2975,565)
  Bottom Layer w8: H2.10 H2.10@1735,210
  Bottom Layer w10: H2.10@1735,210 1875,350 2670,350 2745,425 v1(2815,425) ; G1.3 2975,930 v1(2975,565)
PC5: G1.4 H2.11 U1.12 | length 2775.6
  Top Layer w6: H2.11 1835,266.5 1853.5,285 1853.5,895.56 U1.12
  Top Layer w10: v1(2855,380) 2870,380 v1(3010,520)
  Bottom Layer w8: H2.11 H2.11@1840,200
  Bottom Layer w10: H2.11@1840,200 1950,310 2675,310 2745,380 v1(2855,380) ; v1(3010,520) G1.4
PC8: H2.12 U1.13 | length 1013.1
  Top Layer w6: H2.12 1934.5,200.5 1934.5,240.5 1895.94,279.06 1872.77,279.06 1869.25,282.57 1869.25,889.03 U1.13
PC9: H2.13 U1.14 | length 1087.9
  Top Layer w6: H2.13 2035,260 2001.94,293.06 1888.51,293.06 1885,296.57 1885,882.51 U1.14
PC10: H2.18 U1.30 XZ1.2 | length 4830.9
  Top Layer w6: U1.30 2477.24,1045.25 2477.24,1002.85 2292.15,817.76 2291.95,817.76 2227,752.8 2227,633.4 2244.9,615.5 2247.13,615.5 2285.06,577.57 2352.15,577.57 2392.24,537.48 2392.24,342.76 H2.18
  Bottom Layer w6: 2700,2105 XZ1.2
  Bottom Layer w10: H2.18 2650,85 3206.49,85 3245,123.51 3245,380 3110,515 3110,810 3170,870 3240,870 3310,940 3310,1430 3175,1565 2750,1565 2685,1630 2685,2090 2700,2105
PC11: H2.19 U1.31 XZ1.4 | length 4911.1
  Top Layer w6: U1.31 2492.99,1051.77 2492.99,998.8 2296.2,802.01 2296,802.01 2241,747.01 2241,639.2 2250.7,629.5 2252.93,629.5 2289.11,593.32 2356.2,593.32 2407.99,541.53 2407.99,387.01 2593.02,201.98 2633.02,201.98 H2.19
  Top Layer w10: XZ1.4 XZ1.4@2750,2305
  Bottom Layer w10: H2.19 2635,195 2710,120 3180,120 3205,145 3205,365 3076,494 3076,830.8 3154.31,909.11 3229.11,909.11 3275,955 3275,1415 3155,1535 2735,1535 2655,1615 2655,2215 XZ1.4
PC12: H2.20 U1.32 | length 1496.4
  Top Layer w6: U1.32 2345.38,1222.97 2509.67,1058.68 2509.67,995.68 2257.23,743.23 2257.23,645 2292.23,610 2359.32,610 2424.67,544.65 2424.67,404 2531,404 H2.20
PC13: H2.21 U1.33 | length 1487.8
  Top Layer w6: U1.33 2402.03,1355 v1(2425,1355)
  Bottom Layer w10: v1(2425,1355) 2425,1350.13 2431.35,1343.78 2431.35,1343.65 2585,1190 2585,730.65 2905,410.65 2905,270 H2.21
PC14: H1.9 RN2.6 U1.53 | length 2652
  Top Layer w6: H1.9 1222.52,2207.48 1842.52,2207.48 1855,2195 1855,1622.95 U1.53
  Top Layer w10: RN2.6 1295,1745 1317,1767 v2(1342.5,1767)
  Bottom Layer w16: H1.9 1020,2270 1342.5,1947.5 v2(1342.5,1767)
PC15: H1.8 RN2.7 U1.54 | length 2801.4
  Top Layer w6: U1.54 2075.35,1380.33 2106.01,1380.33 2135.68,1410 v1(2140.34,1410)
  Top Layer w15: v1(750,1930) 769.5,1930 850.5,1849 926,1849 ; RN2.7 1263.5,1796 1210.5,1849 926,1849 ; v1(1515,1315) 1460,1315 926,1849
  Bottom Layer w15: v1(1515,1315) 1615,1415 2132.9,1415 2137.9,1410 v1(2140.34,1410)
  Bottom Layer w16: v1(750,1930) 750,2070 920,2240 H1.8
PD0: H2.15 U1.25 | length 1436
  Top Layer w6: H2.15 2195.75,239.25 2195.75,328.3 2174.05,350 1965,350 1945,370 1945,550 2402.57,1007.57 2402.57,1012.54 2289.57,1125.54 2285.6,1125.54 U1.25
PD1: H1.16 SW1.1 U1.46 | length 4386.5
  Top Layer w6: H1.16 1725,2405 1725,2335 1734.5,2325.5 1975.5,2325.5 2025,2276 2182.84,2276 2245,2213.84 2245,1488.36 2199.3,1442.66 U1.46
  Bottom Layer w15: SW1.1 126.58,1363.43 60,1430 60,2485 70,2495 1635,2495 H1.16
PD2: H1.15 SW2.1 U1.47 | length 4658.8
  Top Layer w6: H1.15 1620,2329.8 1638.3,2311.5 1965.5,2311.5 2015,2262 2177.04,2262 2220,2219.04 2220,1484.76 U1.47
  Top Layer w15: H1.15 1720,2510 3450,2510 3493.51,2466.49 3493.51,1391.76 SW2.1
PD3: H1.14 U1.48 | length 1547.3
  Top Layer w6: H1.14 1632.5,2297.5 1952.5,2297.5 2005,2245 2170,2245 2200,2215 2200,1505 2200,1487.03 U1.48 U1.48@2195.43,1482.47
RTCOUT: H2.14 U1.24 | length 1420.8
  Top Layer w6: H2.14 2180,245 2180,324.25 2170,334.25 1940.95,334.25 1924.25,350.95 1924.25,554.25 2365,995 2365,1023.87 2287.66,1101.2 U1.24
X32KIN: C13.2 U1.22 X2.1 | length 1470.3
  Top Layer w6: U1.22 2259.66,1084.66 2259.66,1059.92 2300,1019.58 v1(2300,965) ; X2.1@2950,1724.96 X2.1
  Top Layer w10: v1(2700,1370) 2680,1390 C13.2 2615.04,1515.04 2841.5,1741.5 X2.1
  POWER03 w6: v1(2300,965) 2300,1020 2320,1040 2425,1040 2700,1315 v1(2700,1370)
X32KOUT: C12.1 U1.23 X2.2 | length 1182.1
  Top Layer w6: U1.23 2273.66,1092.93 2273.66,1076.34 v1(2340,1010)
  Top Layer w10: v1(2830,1315) 2849.96,1334.96 C12.1 2849.96,1578.46 X2.2
  POWER03 w6: v1(2340,1010) 2425,1010 2730,1315 v1(2830,1315)
XTALIN: C8.2 U1.26 X1.1 | length 3110.5
  Top Layer w6: v3(2195,1290) 2195,1238.41 U1.26
  Top Layer w10: v1(2430,1195) 2500,1125 C8.2 ; X1.1 v1(3160,690)
  POWER03 w10: v1(2430,1195) 2650,1415 2950,1415 3035,1330 3035,1210 2980,1155 2780,1155 2559.14,934.14 2559.14,785.86 2655,690 v1(3160,690)
  Bottom Layer w10: v3(2195,1290) 2230,1325 2300,1325 2366.16,1258.84 v1(2430,1195)
XTALOUT: C9.2 U1.27 X1.2 | length 3795.5
  Top Layer w6: v3(2240,1270) 2240,1215.68 U1.27 2430,1025.68 2430,1015 2280,865 2279.8,865 2185,770.2 2185,616.01 2227.51,573.5 2229.73,573.5 2271.16,532.07 2338.25,532.07 2345,525.33 2345,390 2294.5,339.5 2294.5,174 2314.5,154 2751.5,154 2775.5,178 2775.5,727 2717.5,785 2570,785 2546.5,761.5 X1.2
  Top Layer w10: C9.2 v1(2870,1205) v1(2870,1205)
  Top Layer w15: v1(2390,690) X1.2
  POWER03 w15: v1(2390,690) 2390,825 2765,1200 2862.56,1200 2867.56,1205 v1(2870,1205)
pads on no net: G1.1 G1.6 RN2.1 RN2.8 U4.7 U4.8 U4.9 U4.10 U4.11 U4.12 U4.13 U4.14 U4.15 USB1. USB1.A8 USB1.B8 USB2. USB2.A8 USB2.B8 XZ1.1 XZ1.5 XZ1.6 XZ1.8 XZ1.10

## Polygon pours and split planes (outlines as drawn)
GND on Top Layer "GND_L01_P019" (solid, pour order 19): 2.5,0 2.5,2560 3942.5,2560 3942.5,0
GND on Top Layer "GND_L01_P018" (solid, remove dead copper, pour order 18): 1929.74,1305.26 1915,1320 1885,1320 1845,1280 1845,1260 1880,1225 1905,1225 1950,1270 1950,1278.36
3.3V on Top Layer "3.3V_L01_P017" (solid, remove dead copper, pour order 17): 1975,1105 1986.14,1105 1995,1096.14 1995,1075 1905,985 1880,985 1865,1000 1865,1015 1925,1075 1945,1075
GND on POWER03 "GND_L03_P020" (solid, pour order 20): 2.5,0 2.5,2560 3942.5,2560 3942.5,0
GND on Bottom Layer "GND_L04_P021" (solid, pour order 21): 2.5,0 2.5,2560 3942.5,2560 3942.5,0
GND on GND02 (split plane): 3922.4,20.1 22.6,20.1 22.6,2539.9 3922.4,2539.9

## Silkscreen, mask and mechanical layers (free items; w line width, h text height)
Top Overlay:
  drawing of 6638 lines, arcs and shapes, not listed
  text "——By YeahZifeng" at 765,394 h120
  text "2022.3.26" at 1060,295.84 h70
Bottom Overlay:
  text "YZF" at 1930,51.44 h120
  text "CWQ" at 2150,50.55 h120
  text "PWJ" at 2360,50.33 h120
  text "XMX" at 2590,50.44 h120
Mechanical 1:
  lines w20: -2.5,0 2.5,0 ; 2.5,2555 2.5,0 ; 2.5,2560 3942.5,2560 3942.5,0 2.5,0

## Dimensions
-2.5,0 to -152.5,2560 on Mechanical 1
-2.5,0 to 3942.5,-200 on Mechanical 1

## Text inside footprints (layer, text, board x,y; h text height)
B1: Top Overlay "4" at 1285,535 h50; Top Overlay "1" at 820,535 h50
G1: Top Overlay "6" at 3295,975 h39.37; Top Overlay "1" at 2600,975 h39.37
XZ1: Top Overlay "1" at 2765,1905 h39.37 r90; Top Overlay "5" at 2630,2390 h39.37; Top Overlay "10" at 3410,2390 h39.37; Top Overlay "6" at 3350,1905 h39.37 r90